# Altium PCB PWMDriver.PcbDoc
Units mm, origin at the board's own origin, x right, y up, seen from the top; angles counter-clockwise.
Board outline 19.68 x 15.88 mm, 2 copper layers (Top Layer, Bottom Layer); 6 components, 8 nets, 24 pads, 0 vias.
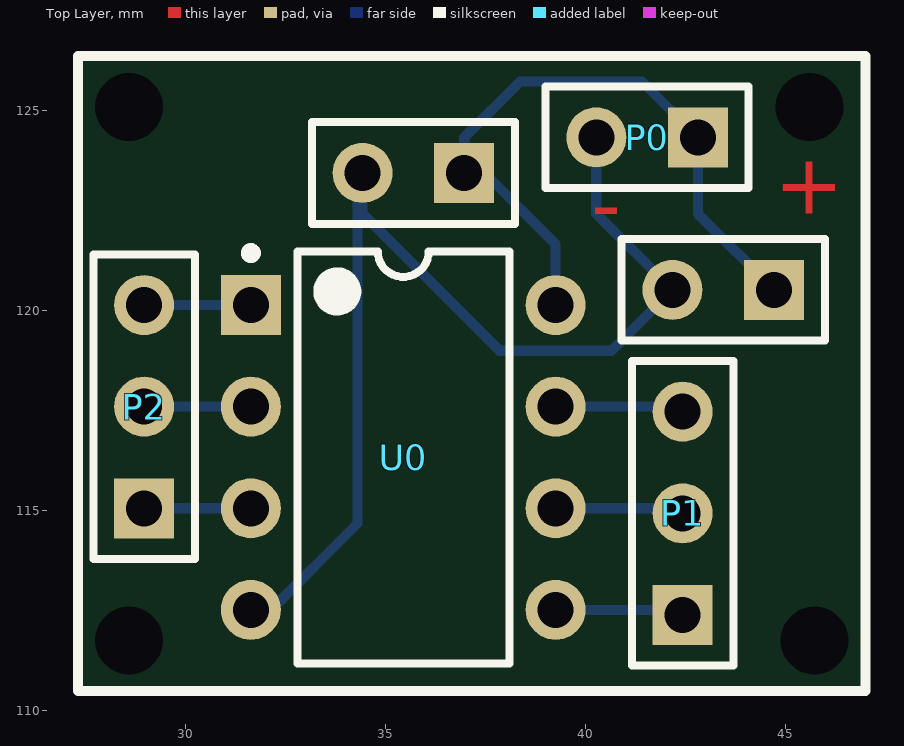
[diagram p0: Top Layer view]
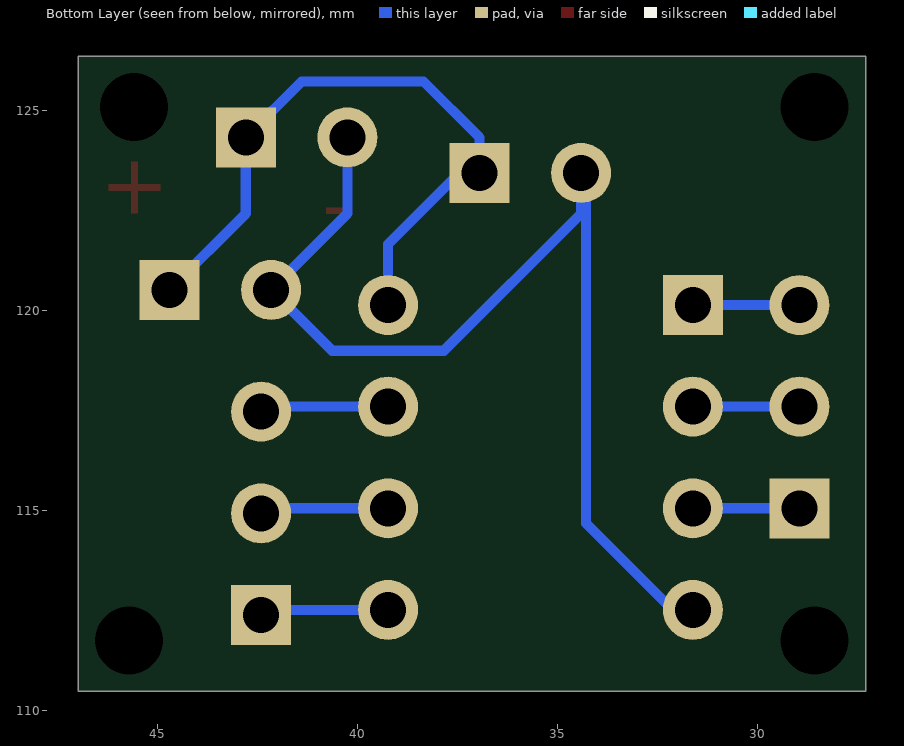
[diagram p1: Bottom Layer view, seen from below]

## Layer stack, top to bottom
Top Layer: signal copper 0.0356
Dielectric: dielectric 0.32, FR-4, Dk 4.8
Bottom Layer: signal copper 0.0356

## Board outline
27.305,126.365 27.305,110.49 46.99,110.49 46.99,126.365

## Design rules (kind name [scope] priority, off if disabled: settings)
Clearance [All] p1: gap=0.254
PolygonConnect [All] p1: connectstyle=Relief reliefconductorwidth=0.254 reliefentries=4 polygonreliefangle="90 Angle" airgapwidth=0.254
RoomDefinition PWMDriver [InComponentClass('PWMDriver')] p1: confinementstyle=ConfineIn formatcopy=TRUE lockcomponents=FALSE outline 27.305,110.49 46.99,110.49 46.99,126.365 27.305,126.365
RoutingVias [All] p1: holewidth=0.711 width=1.27 viastyle="Through Hole" minholewidth=0.711 minwidth=1.27 maxholewidth=0.711 maxwidth=1.27
SolderMaskExpansion [All] p1: expansion=0.102
Width [All] p1: maxlimit=0.254 minlimit=0.254 preferedwidth=0.254
28 further rules are at their usual default settings.

## Classes and differential pairs
component class PWMDriver: P0 P2 U0

## Components (designator, comment, footprint, x,y, rotation, side; value= is the part's Value field where it differs from the comment)
P0 "Input Voltage" HDR1X2 42.799,124.333 r180 top
P1 "PB0-PB2" HDR1X3 42.418,112.395 r90 top
P2 "PB3 -PB5" HDR1X3 28.956,115.062 r90 top
P3 "Output Voltage" HDR1X2 36.957,123.444 r180 top
P4 "Output Voltage2" HDR1X2 44.704,120.523 r180 top
U0 "ATtiny85-20PU" 8P3 35.433,116.332 r0 top

## Footprints (in the part's own frame and the unit in brackets; to place one, negate y for a bottom-side part, rotate by r counter-clockwise, add the part's x,y. Pads: shape width x height; smd on the part's side, far side on the other; paste and mask are expansions set on the pad)
8P3 [mm] "DIP, 8-Leads, Row Spacing 7.62mm, Pitch 2.54mm, Body 9.59x6.61mm"
  rect 1.5x1.5 hole 0.9: 1(-3.81,3.81)
  round 1.5 hole 0.9: 2(-3.81,1.27) 3(-3.81,-1.27) 4(-3.81,-3.81) 5(3.81,-3.81) 6(3.81,-1.27) 7(3.81,1.27) 8(3.81,3.81)
  silkscreen extent -3.93,-5.15 2.65,5.23, body extent -3.6,-5.15 3.6,5.15, height 5.34
HDR1X2 [mm] "Connector; Header; 2 Position"
  rect 1.5x1.5 hole 0.9: 1(0,0)
  round 1.5 hole 0.9: 2(2.54,0)
  silkscreen extent -1.27,-1.27 3.81,1.27
HDR1X3 [mm] "Connector; Header; 3 Position"
  rect 1.5x1.5 hole 0.9: 1(0,0)
  round 1.5 hole 0.9: 2(2.54,0) 3(5.08,0)
  silkscreen extent -1.27,-1.27 6.35,1.27

## Part data
P0 P3 P4: library part "Header 2", "Header, 2-Pin"
P1 P2: library part "Header 3", "Header, 3-Pin"
U0: "Low Power tinyAVR® 8-Bit Microcontroller, 8K Flash Memory, 20MHz, Industrial Temperature, 8-Lead PDIP, Pb-Free"

## Free pads (board coordinates)
  round 1.524 hole 1.7: 0(28.575,125.095) 1(28.575,111.76) 2(45.72,111.76) 3(45.593,125.095)

## Nets (pads, with @x,y where several pads share a name; then routed paths per layer and width w, separated by ;. In a path a pad name is that pad's centre, name@x,y a point inside that pad or via, vN(x,y) a via of type N, cw(c..) or ccw(c..) an arc to the next point about the centre after c; other vN are vias at no path point)
GND: P0.2 P3.2 P4.2 U0.4 | length 27.8
  Bottom Layer w0.254: U0.4 32.131,112.522 34.29,114.681 34.29,123.317 P3.2 34.417,122.428 37.846,118.999 40.64,118.999 P4.2 40.259,122.428 P0.2
NetP1_1: P1.1 U0.5 | length 3.2
  Bottom Layer w0.254: U0.5 42.291,112.522 P1.1
NetP1_2: P1.2 U0.6 | length 3.2
  Bottom Layer w0.254: U0.6 42.291,115.062 P1.2
NetP1_3: P1.3 U0.7 | length 3.2
  Bottom Layer w0.254: U0.7 42.291,117.602 P1.3
NetP2_1: P2.1 U0.3 | length 2.7
  Bottom Layer w0.254: P2.1 U0.3
NetP2_2: P2.2 U0.2 | length 2.7
  Bottom Layer w0.254: P2.2 U0.2
NetP2_3: P2.3 U0.1 | length 2.7
  Bottom Layer w0.254: P2.3 U0.1
VCC: P0.1 P3.1 P4.1 U0.8 | length 17
  Bottom Layer w0.254: U0.8 39.243,121.666 37.465,123.444 P3.1 36.957,124.333 38.354,125.73 41.402,125.73 P0.1 42.799,122.428 P4.1

## Other copper
Top Layer:
  text "+" at 44.704,122.428 h1.52
  text "-" at 40.132,121.92 h1.52

## Silkscreen, mask and mechanical layers (free items; w line width, h text height)
Top Overlay:
  the board outline again, w0.254